# Altium PCB BOARD_34.PcbDoc
Units mm, origin at the board's own origin, x right, y up, seen from the top; angles counter-clockwise.
Board outline 34 x 34 mm, 2 copper layers (Top Layer 1, Bottom Layer 1), stack 1.6 mm thick; 56 components, 40 nets, 215 pads, 75 vias.
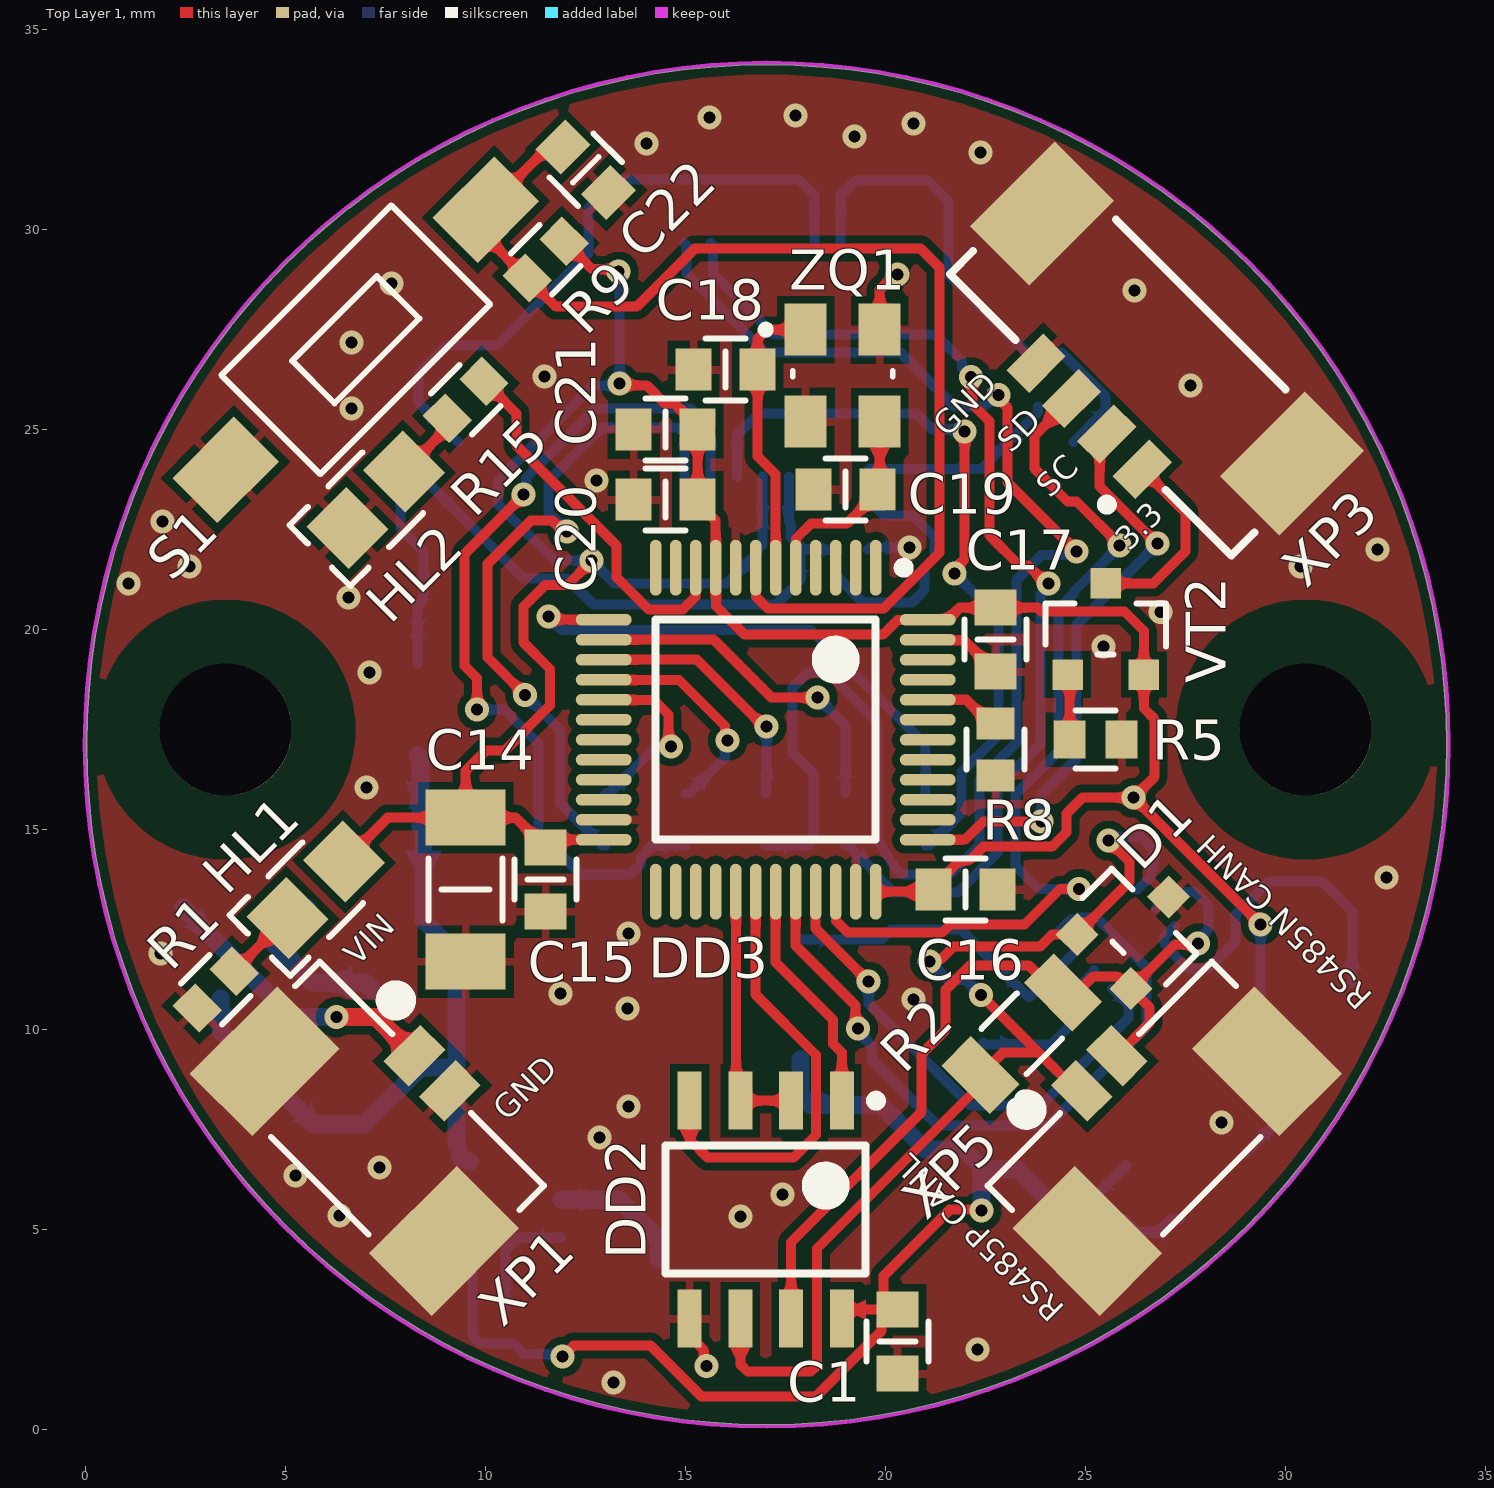
[diagram p0: Top Layer 1 view]
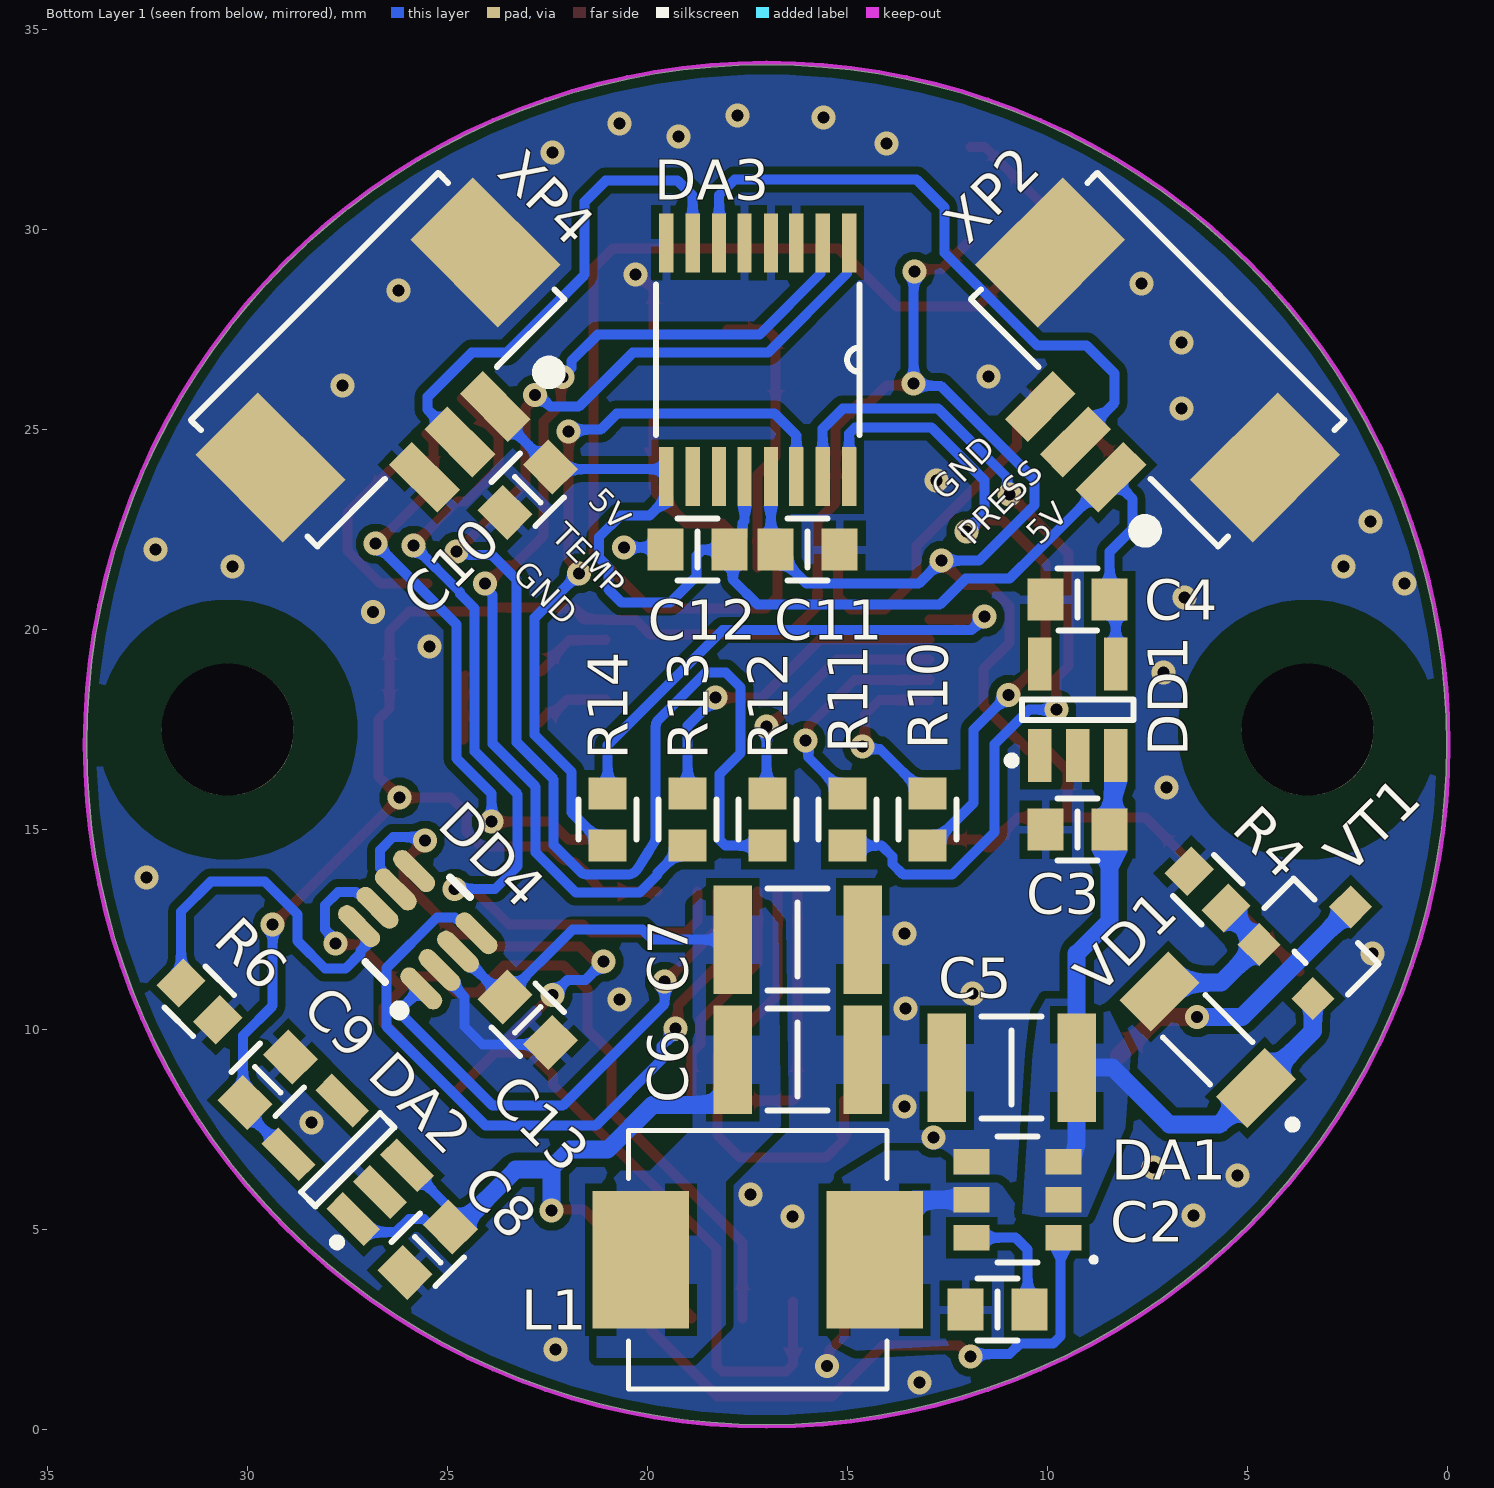
[diagram p1: Bottom Layer 1 view, seen from below]
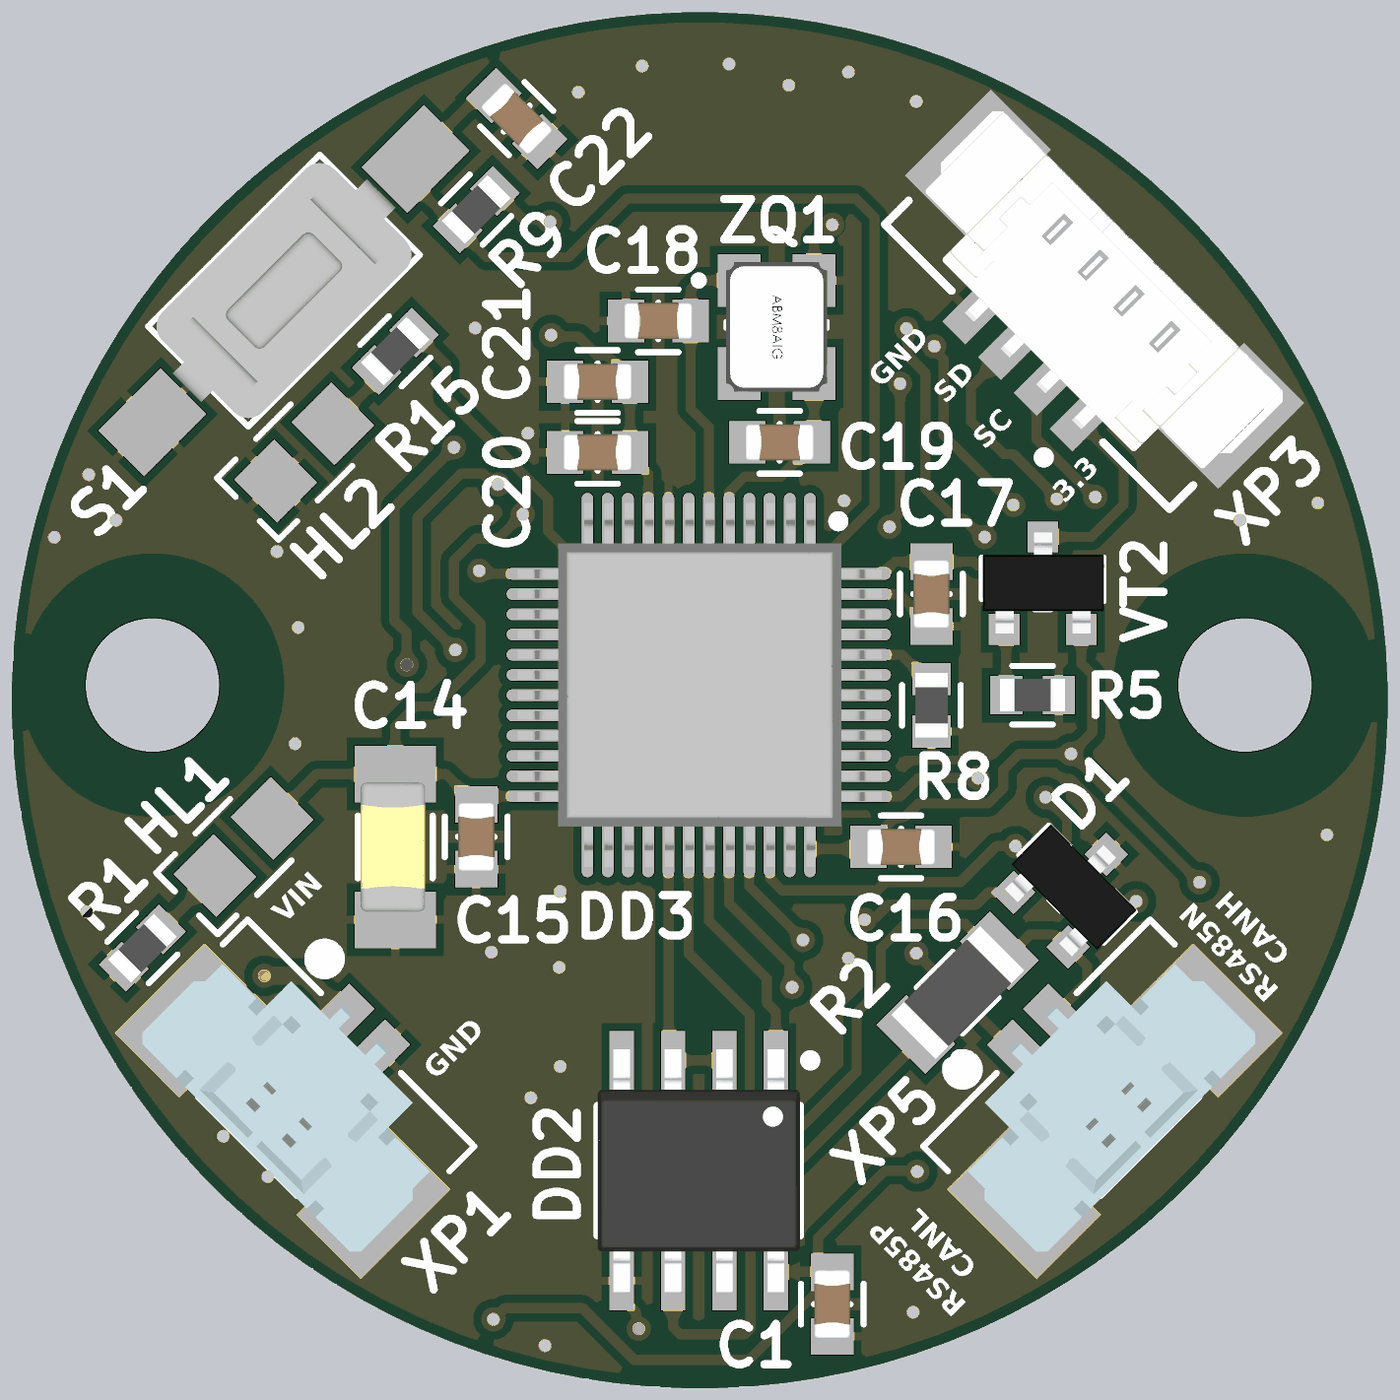
[diagram p2: 3D render of the assembled board from above, using the file's embedded part models]
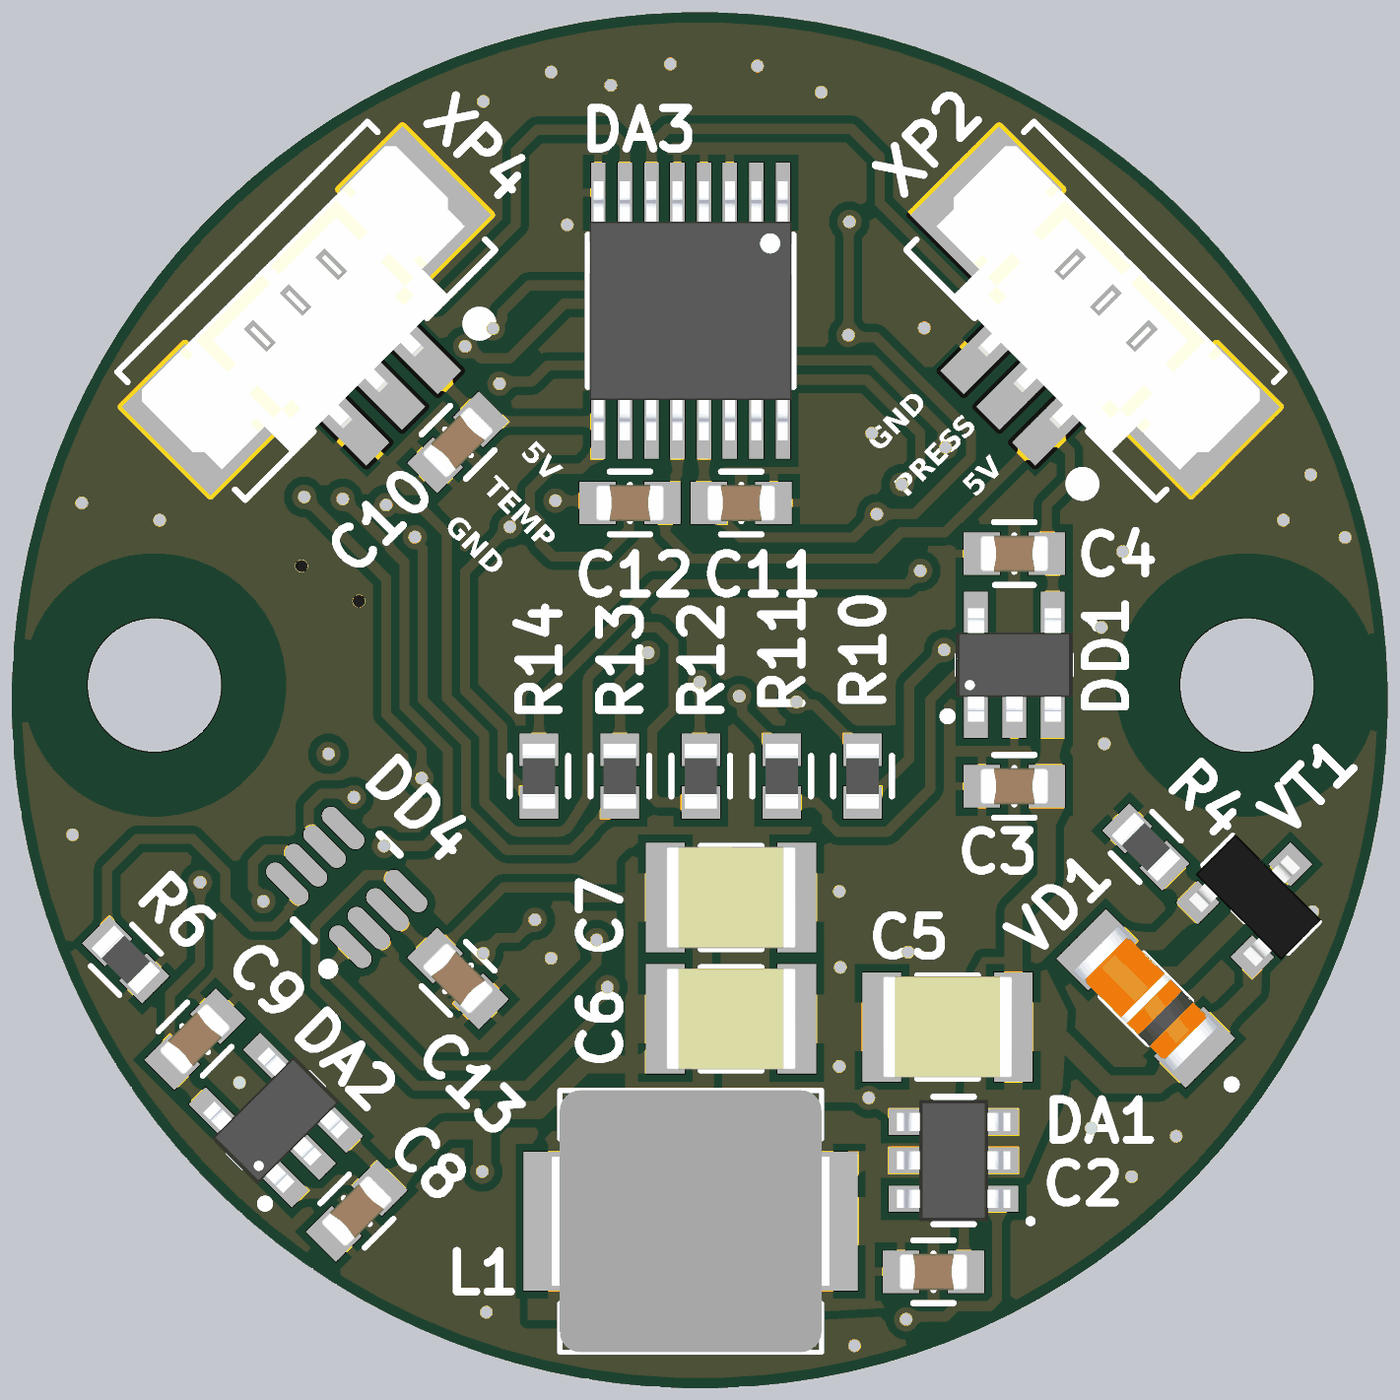
[diagram p3: 3D render of the assembled board from below, using the file's embedded part models]

## Layer stack, top to bottom
Top Solder: solder mask 0.0102, Solder Resist, Dk 3.5
Top Layer 1: signal copper 0.035
Dielectric 1: dielectric 1.53, FR-4, Dk 4.8
Bottom Layer 1: signal copper 0.035
Bottom Solder: solder mask 0.0102, Solder Resist, Dk 3.5

## Board outline
17.025,0.125 cw(c17.025,17.125) 0.025,17.125 cw(c17.025,17.125) 17.025,34.125 cw(c17.025,17.125) 34.025,17.125 cw(c17.025,17.125)

## Design rules (kind name [scope] priority, off if disabled: settings)
BoardOutlineClearance "BoardOutlineClearance 1" [All] p1: gap=0.25 ignorepadtopadclearanceinfootprint=FALSE except(0: Arc-SplitContinuation Track-SplitContinuation SMDPad-SplitContinuation THPad-SplitContinuation Via-SplitContinuation Fill-SplitContinuation Poly-SplitContinuation Region-SplitContinuation Text-SplitContinuation) // Milling
BoardOutlineClearance "BoardOutlineClearance 2" [All] p2: gap=0.4 ignorepadtopadclearanceinfootprint=FALSE except(0: Arc-SplitContinuation Track-SplitContinuation SMDPad-SplitContinuation THPad-SplitContinuation Via-SplitContinuation Fill-SplitContinuation Poly-SplitContinuation Region-SplitContinuation Text-SplitContinuation) // V-Cut
Clearance [All] p1: gap=0.2 ignorepadtopadclearanceinfootprint=FALSE
DiffPairsRouting [All] p1: maxlimit=0.254 minlimit=0.2 mostfreqgap=0.2 toplayer_minwidth=0.2 toplayer_maxwidth=0.35 toplayer_prefwidth=0.3 bottomlayer_minwidth=0.2 bottomlayer_maxwidth=0.35 bottomlayer_prefwidth=0.3 maxuncoupledlength=10
HoleSize [All] p1: absolutevalues=TRUE maxlimit=10 minlimit=0.3 maxpercent=80.000 minpercent=20.000
HoleToHoleClearance [All] p1: gap=0.2 allowstackedmicrovias=TRUE
MinimumAnnularRing MinimumAnnularRing_via [IsVia] p1: minimumring=0.15
MinimumAnnularRing [All] p2: minimumring=0.2
MinimumSolderMaskSliver [All] p1: minsoldermaskwidth=0.1
PlaneClearance [All] p1: clearance=0.2
PlaneConnect [All] p1: planeconnectstyle=Relief reliefexpansion=0.5 reliefentries=4 reliefconductorwidth=0.2 reliefairgap=0.3
PolygonConnect PolygonConnect_2 [InPadClass('direct')] p1: connectstyle=Direct reliefconductorwidth=0.254 reliefentries=4 polygonreliefangle="90 Angle" airgapwidth=0.254
PolygonConnect PolygonConnect_1 [InPadClass('power')] p2: connectstyle=Relief reliefconductorwidth=1.2 reliefentries=4 polygonreliefangle="90 Angle" conductorbypadedge=TRUE mindistance=0.1 enablemindistance=FALSE airgapwidth=0.2
PolygonConnect [All] p3: thpad.connectstyle=Relief thpad.reliefconductorwidth=0.2 thpad.reliefentries=4 thpad.polygonreliefangle="90 Angle" thpad.airgapwidth=0.2 smdpad.connectstyle=Relief smdpad.reliefconductorwidth=0.2 smdpad.reliefentries=4 smdpad.polygonreliefangle="90 Angle" smdpad.airgapwidth=0.2 via.connectstyle=Direct via.reliefconductorwidth=0.2 via.reliefentries=4 via.polygonreliefangle="90 Angle" via.airgapwidth=0.2
RoutingCorners [All] p1: cornerstyle=45-Degree minsetback=2 maxsetback=2
RoutingVias [All] p1: holewidth=0.3 width=0.6 viastyle="Through Hole" minholewidth=0.3 minwidth=0.6 maxholewidth=0.5 maxwidth=0.8
SilkToSilkClearance [All] p1: silktosilkclearance=0.15
SilkToSolderMaskClearance [IsPad] p1: minsilkscreentomaskgap=0.1 clearancetoexposedcopper=TRUE
SolderMaskExpansion SolderMaskExpansion_1 [IsVia] p1: expansion=0.102 istentingtop=TRUE
SolderMaskExpansion [All] p2: expansion=0.025 istentingtop=FALSE
SupplyNets "Schematic Supply Nets_9" [InNet('5V')] p1: voltage=0.000
SupplyNets "Schematic Supply Nets_8" [InNet('3.3V')] p2: voltage=0.000
SupplyNets "Schematic Supply Nets_7" [InNet('5RV')] p3: voltage=0.000
SupplyNets "Schematic Supply Nets_6" [InNet('GND')] p4: voltage=0.000
SupplyNets "Schematic Supply Nets_5" [InNet('24V')] p5: voltage=0.000
SupplyNets "Schematic Supply Nets_4" [InNet('+3,3В_IN')] p6: voltage=0.000
SupplyNets "Schematic Supply Nets_3" [InNet('+5В_IN')] p7: voltage=0.000
SupplyNets "Schematic Supply Nets_2" [InNet('+5В')] p8: voltage=0.000
SupplyNets "Schematic Supply Nets_1" [InNet('GND')] p9: voltage=0.000
SupplyNets "Schematic Supply Nets" [InNet('+3,3В')] p10: voltage=0.000
Width [All] p1: maxlimit=0.45 minlimit=0.15 preferedwidth=0.25
21 further rules are at their usual default settings.

## Classes and differential pairs
pad class direct: DA1-2 DA1-3 DA1-4 DA1-5 XP1-3 XP1-4 XP2-4 XP2-5 XP3-5 XP3-6 XP4-4 XP4-5 XP5-3 XP5-4
pad class power: C5-1 C5-2 C6-1 C6-2 C7-1 C7-2 L1-1 L1-2
differential pair RS485: +RS485_P -RS485_N

## Components (designator, comment, footprint, x,y, rotation, side; value= is the part's Value field where it differs from the comment)
C1 "Capacitor" 0603C 20.3,2.2 r90 top value="0,1 мк"
C2 "Capacitor" 0603C 11.25,3 r180 bottom value="0,1 мк"
C3 "Capacitor" 0603C 9.25,15 r0 bottom value="0,1 мк"
C4 "Capacitor" 0603C 9.25,20.75 r180 bottom value="0,1 мк"
C5 "Capacitor" 1210C 10.9,9.05 r180 bottom value="10 мк"
C6 "Capacitor" 1210C 16.25,9.25 r0 bottom value="22 мк"
C7 "Capacitor" 1210C 16.25,12.25 r0 bottom value="22 мк"
C8 "Capacitor" 0603C 25.5,4.5 r135 bottom value="1 мк"
C9 "Capacitor" 0603C 29.5,8.75 r315 bottom value="1 мк"
C10 "Capacitor" 0603C 23,23.5 r135 bottom value="0,1 мк"
C11 "Capacitor" 0603C 16,22 r0 bottom value="0,1 мк"
C12 "Capacitor" 0603C 18.75,22 r180 bottom value="0,1 мк"
C13 "Capacitor" 0603C 23,10.25 r45 bottom value="0,1 мк"
C14 "Capacitor" 1206C 9.5,13.5 r90 top value="4,7 мк"
C15 "Capacitor" 0603C 11.5,13.75 r90 top value="0,1 мк"
C16 "Capacitor" 0603C 22,13.5 r180 top value="0,1 мк"
C17 "Capacitor" 0603C 22.75,19.75 r90 top value="0,1 мк"
C18 "Capacitor" 0603C 16,26.5 r0 top value="12 п"
C19 "Capacitor" 0603C 19,23.5 r0 top value="12 п"
C20 "Capacitor" 0603C 14.5,23.25 r0 top value="0,1 мк"
C21 "Capacitor" 0603C 14.5,25 r0 top value="1 мк"
C22 "Capacitor" 0603C 12.5,31.5 r315 top value="0,1 мк"
D1 "PSM712" SOT23-3 26.25,12.5 r45 top
DA1 "AP63205" TSOT26 10.75,5.75 r90 bottom
DA2 "ADP150AUJZ-3.3" SOT23-5 27.5,6.75 r45 bottom
DA3 "ADS1220IPWR" TSSOP-16 17.25,26.75 r270 bottom
DD1 "ADR02BUJZ" SOT23-5 9.25,18 r90 bottom
DD2 "MAX485CSA" SOIC-8 17,5.5 r270 top
DD3 "STM32F103C8T6" LQFP48 17,17.5 r270 top
DD4 "MAX3051EKA+T" SOT-23-8 25.75,12.5 r45 bottom
HL1 "LED" 0805D 5.75,13.5 r225 top value=������
HL2 "LED" 0805D 7.25,23.25 r225 top value=Красный
L1 "IHLP2525CZER4R7M01" IHLP-2525 17.25,4.25 r0 bottom value="4,7 мк"
R1 "Resistor" 0603R 3.25,11 r225 top value="1,0 к"
R2 "Resistor" 1206R 23.4,9.9 r225 top value=120
R4 "Resistor" 0603R 6,13.5 r225 bottom value="100 к"
R5 "Resistor" 0603R 25.25,17.25 r0 top value="10 к"
R6 "Resistor" 0603R 31.21,10.71 r225 bottom value="10 к"
R8 "Resistor" 0603R 22.75,17 r270 top value="10 к"
R9 "Resistor" 0603R 11.5,29.25 r225 top value="10 к"
R10 "Resistor" 0603R 13,15.25 r90 bottom value=47
R11 "Resistor" 0603R 15,15.25 r90 bottom value=47
R12 "Resistor" 0603R 17,15.25 r90 bottom value=47
R13 "Resistor" 0603R 19,15.25 r90 bottom value=47
R14 "Resistor" 0603R 21,15.25 r90 bottom value=47
R15 "Resistor" 0603R 9.5,25.75 r45 top value=470
S1 "Tact_button" Button_SMD_10mm 6.75,27.25 r225 top
VD1 "BZV55-B12" mini_MELF_3.5mm 6,9.75 r45 bottom value="12 В"
VT1 "AO3401A" SOT23-3 3.25,12.25 r135 bottom
VT2 "AO3401A" SOT23-3 25.5,20 r90 top
XP1 "533984002" Picoblade_533984002 7.25,7.5 r135 top
XP2 "Picoblade_532610371" CONN_532610001-SD_03_MOL 7.25,26.75 r225 bottom
XP3 "53398-0471" 53398-0471 26.5,26.75 r315 top
XP4 "Picoblade_532610371" CONN_532610001-SD_03_MOL 26.75,26.75 r135 bottom
XP5 "533984002" Picoblade_533984002 26.75,7.5 r225 top
ZQ1 "XTAL_GND" QSMD3.2x2.5 18,27.5 r0 top value="8 МГц"

## Footprints (in the part's own frame and the unit in brackets; to place one, negate y for a bottom-side part, rotate by r counter-clockwise, add the part's x,y. Pads: shape width x height; smd on the part's side, far side on the other; paste and mask are expansions set on the pad)
0603C [mm] "Chip Resistor, 2-Leads, Body 1,40x0,80mm, IPC Medium Density"
  rect 0.9x1.05 smd: 1(-0.8,0) 2(0.8,0)
  silkscreen extent -0.5,-0.77 0.5,0.77, body extent -0.85,-0.45 0.85,0.45, height 0.9
0603R [mm] "Chip Resistor, 2-Leads, Body 1.60x0.85mm, IPC Medium Density"
  rect 0.8x0.95 smd: 1(-0.65,0) 2(0.65,0)
  silkscreen extent -0.5,-0.73 0.5,0.73, body extent -0.8,-0.4 0.8,0.4, height 0.45
0805D [mm]
  rect 1.4x1.5 smd: 1(-1,0) 2(1,0)
  silkscreen extent -0.6,-1.07 1.98,1.07, body extent -1.07,-0.7 1.07,0.7, height 0.7
1206C [mm]
  rect 1.4x2 smd paste+0: 1(-1.8,0) 2(1.8,0)
  silkscreen extent -0.77,-0.92 0.77,0.92, body extent -1.6,-0.74 1.6,0.86, height 1.59
1206R [mm]
  rect 1.05x1.72 smd: 1(-1.46,0) 2(1.46,0)
  silkscreen extent -0.63,-0.8 0.63,0.8, body extent -1.55,-0.78 1.55,0.77, height 0.65
1210C [mm]
  rect 0.954x2.706 smd paste+0: 1(-1.625,0) 2(1.625,0)
  silkscreen extent -0.75,-1.28 0.75,1.28, body extent -1.6,-1.25 1.6,1.25, height 2.7
53398-0471 [mm]
  rect 0.8x1.3 smd paste+0 mask+0: 1(1.875,-2) 2(0.625,-2) 3(-0.625,-2) 4(-1.875,-2)
  rect 2.1x3 smd paste+0 mask+0: 5(-4.425,0.75) 6(4.425,0.75)
  silkscreen extent -4.97,-3.37 4.97,1.95, body extent -5.58,-2.75 5.58,2.35, height 0.25
Button_SMD_10mm [mm]
  rect 2.18x1.6 smd: 1(-4.6,0) 2(4.6,0)
  silkscreen extent -3,-1.75 3,1.75, body extent -3.4,-1.75 3.4,1.75, height 5.2
CONN_532610001-SD_03_MOL [mil]
  rect 32x67 smd paste+0 mask+4.02: 1(49.21,-114.35) 2(0,-114.35) 3(-49.21,-114.35)
  rect 87x122 smd paste+0 mask+4.02: 4(-149.61,-0.18) 5(149.61,-0.18)
  silkscreen extent -172,-136 172,88, body extent -175,-106 175,59, height 185
IHLP-2525 [mil]
  rect 95x135 smd: 1(-115,0) 2(115,0)
  silkscreen extent -127,-127 127,127, body extent -135,-127 135,127, height 118
LQFP48 [mm] "TSQFP, 48-Leads, Body 7,00x7,00mm, Pitch 0,50mm, IPC Medium Density"
  oval 1.4x0.29 smd: 1(-4.05,2.75) 2(-4.05,2.25) 3(-4.05,1.75) 4(-4.05,1.25) 5(-4.05,0.75) 6(-4.05,0.25) 7(-4.05,-0.25) 8(-4.05,-0.75) 9(-4.05,-1.25) 10(-4.05,-1.75) 11(-4.05,-2.25) 12(-4.05,-2.75) 25(4.05,-2.75) 26(4.05,-2.25) 27(4.05,-1.75) 28(4.05,-1.25) 29(4.05,-0.75) 30(4.05,-0.25) 31(4.05,0.25) 32(4.05,0.75) 33(4.05,1.25) 34(4.05,1.75) 35(4.05,2.25) 36(4.05,2.75)
  oval 0.29x1.4 smd: 13(-2.75,-4.05) 14(-2.25,-4.05) 15(-1.75,-4.05) 16(-1.25,-4.05) 17(-0.75,-4.05) 18(-0.25,-4.05) 19(0.25,-4.05) 20(0.75,-4.05) 21(1.25,-4.05) 22(1.75,-4.05) 23(2.25,-4.05) 24(2.75,-4.05) 37(2.75,4.05) 38(2.25,4.05) 39(1.75,4.05) 40(1.25,4.05) 41(0.75,4.05) 42(0.25,4.05) 43(-0.25,4.05) 44(-0.75,4.05) 45(-1.25,4.05) 46(-1.75,4.05) 47(-2.25,4.05) 48(-2.75,4.05)
  silkscreen extent -4.17,-2.75 2.75,3.58, body extent -4.5,-4.47 4.5,4.52, height 1.48
mini_MELF_3.5mm [mm]
  rect 1.11x1.73 smd: 1(1.705,0) 2(-1.705,0)
  silkscreen extent -3.1,-0.75 0.83,0.75, body extent -1.75,-0.8 1.75,0.8, height 1.59
Picoblade_533984002 [mil]
  rect 35x51 smd: 1(24.61,-78.57) 2(-24.61,-78.57)
  rect 87x122 smd: 3(-125,29.69) 4(125,29.69)
  silkscreen extent -156,-114 156,78, body extent -151,-85 151,80, height 185
QSMD3.2x2.5 [mm] "Кварцевый резонатор"
  rect 1.05x1.3 smd: 1(0,0) 2(1.85,-2.3) 3(0,-2.3) 3(1.85,0)
  silkscreen extent -1.1,-1.18 2.18,0.1, body extent -0.32,-2.75 2.18,0.45, height 0.8
SOIC-8 [mm] "for operational amplifier"
  rect 1.45x0.6 smd: 1(-2.725,1.905) 2(-2.725,0.635) 3(-2.725,-0.635) 4(-2.725,-1.905) 5(2.725,-1.905) 6(2.725,-0.635) 7(2.725,0.635) 8(2.725,1.905)
  silkscreen extent -2.85,-2.5 1.6,2.88, body extent -3,-2.5 3,2.5, height 1.75
SOT23-3 [mil]
  rect 30x30 smd: 1(-44.29,37.4) 2(-44.29,-37.6) 3(45.71,-0.1)
  silkscreen extent -25,-59 26,59, body extent -48,-60 50,59, height 41
SOT23-5 [mm]
  rect 1.32x0.59 smd: 1(-1.145,0.95) 2(-1.145,0) 3(-1.145,-0.95) 4(1.145,-0.95) 5(1.145,0.95)
  silkscreen extent -1.37,-1.4 0.25,1.75, body extent -1.4,-1.45 1.4,1.45, height 1.45
SOT-23-8 [mm] "SOP, 8-Leads, Body 2.9x1.6mm, Pitch 0.65mm, IPC High Density"
  oval 1.3x0.45 smd: 1(-1.1,0.975) 2(-1.1,0.325) 3(-1.1,-0.325) 4(-1.1,-0.975) 5(1.1,-0.975) 6(1.1,-0.325) 7(1.1,0.325) 8(1.1,0.975)
  silkscreen extent -1.22,-1.5 0.35,1.87, body extent -0.85,-1.5 0.85,1.5, height 1.45
TSOT26 [mm]
  rect 0.645x0.9 smd: 1(-0.95,-1.15) 2(0,-1.15) 3(0.95,-1.15) 4(0.95,1.15) 5(0,1.15) 6(-0.95,1.15)
  silkscreen extent -1.58,-1.95 1.57,0.5, body extent -1.5,-1.4 1.5,1.4, height 1.01
TSSOP-16 [mil]
  rect 58x14 smd: 1(-115,90) 2(-115,64) 3(-115,38) 4(-115,13) 5(-115,-13) 6(-115,-38) 7(-115,-64) 8(-115,-90) 9(115,-90) 10(115,-64) 11(115,-38) 12(115,-13) 13(115,13) 14(115,38) 15(115,64) 16(115,90)
  silkscreen extent -74,-100 74,100, body extent -126,-98 126,98, height 43

## Part data
C1 C2 C3 C4 C10 C11 C12 C13 C15 C16 C17 C20 C22: library part Capacitor_0,1u_10_50V_X7R_0603C, "Конденсатор 0603C ёмкостью 0,1 мк 10%, 50 В, X7R", Capacity (nF)=100, Dielectric=X7R, Tolerance=10%, Voltage (V)=50, Part Number=Capacitor_0,1u_10_50V_X7R_0603C
C5: library part Capacitor_10u_10_35V_X7R_1210C, "Конденсатор 1210C ёмкостью 10 мк 10%, 35 В, X7R", Capacity (nF)=10000, Dielectric=X7R, Tolerance=10%, Voltage (V)=35, Part Number=Capacitor_10u_10_35V_X7R_1210C
C6 C7: library part Capacitor_22u_10_25V_X7R_1210C, "Конденсатор 1210C ёмкостью 22 мк 10%, 25 В, X7R", Capacity (nF)=22000, Dielectric=X7R, Tolerance=10%, Voltage (V)=25, Part Number=Capacitor_22u_10_25V_X7R_1210C
C8 C9 C21: library part Capacitor_1u_10_25V_X7R_0603C, "Конденсатор 0603C ёмкостью 1 мк 10%, 25 В, X7R", Capacity (nF)=1000, Dielectric=X7R, Tolerance=10%, Voltage (V)=25, Part Number=Capacitor_1u_10_25V_X7R_0603C
C14: library part Capacitor_4,7u_10_50V_X7R_1206C, "Конденсатор 1206C ёмкостью 4,7 мк 10%, 50 В, X7R", Capacity (nF)=4700, Dielectric=X7R, Tolerance=10%, Voltage (V)=50, Part Number=Capacitor_4,7u_10_50V_X7R_1206C
C18 C19: library part Capacitor_12p_5_50V_NP0_0603C, "Конденсатор 0603C ёмкостью 12 п 5%, 50 В, NP0", Capacity (nF)=0,012, Dielectric=NP0, Tolerance=5%, Voltage (V)=50, Part Number=Capacitor_12p_5_50V_NP0_0603C, Автор=glebmih
D1: "Защитный диод для линии RS-485", Interface=RS-485, Part Number=PSM712
DA1: "DC-DC понижающий преобразователь, Vin: 3.8 - 40 В; 5 В; 2 А", Datasheet=https://static.chipdip.ru/lib/416/DOC012416105.pdf, Part Number=AP63205, Автор=glebmih
DA2: "Стабилизатор напряжения 3.3В 150мА", Datasheet=https://static.chipdip.ru/lib/986/DOC003986581.pdf, Part Number=ADP150AUJZ-3.3, Автор=glebmih
DA3: "24-Бит Sigma-Delta аналого-цифровой преобразователь", Datasheet="Low-Power, Low-Noise, 24-Bit, ADC for Small-Signal Sensors (Rev. B)", Part Number=ADS1220IPWR, Автор=Vouka06
DD1: "Источник опорного напряжения, 5В", Datasheet="ADR01/ADR02/ADR03/ADR06 (Rev. S)", Part Number=ADR02BUJZ, Автор=Vouka05
DD2: "RS-485 ���������������", Part Number=MAX485CSA
DD3: "Микроконтроллер", Case=корпус, Manufacturer="ST Microelectronics", Value1=MCU, Datasheet=http://www.st.com/content/ccc/resource/technical/document/datasheet/33/d4/6f/1d/df/0b/4c/6d/CD00161566.pdf/files/CD00161566.pdf/jcr:content/translations/en.CD00161566.pdf, Notice="48 пиновая версия STM32F103", Part Number=STM32F103C8T6, Rate=-0,3...4,0В, Shop="магазин с самой дешевой ценой"
DD4: "CAN трансивер 1Mbps +3.3В", Datasheet="MAX3051 - +3.3V, 1Mbps, Low-Supply-Current CAN Transceiver", Part Number=MAX3051EKA+T, Автор=Vouka06
HL1 HL2: "Светодиод", Part Number=LED
L1: "ЧИП-индуктивность экранированная 4,7мкГн ±20% 5,5A 40мОм 2525", Current="5,5 А", Inductance (μH)=4,7, Part Number=IHLP2525CZER4R7M01
R1: library part Resistor_1.0k_1_0603, "Резистор номиналом 1,0 кОм 1%", Tolerance=1%, Part Number=Resistor_1.0k_1_0603
R2: library part Resistor_120_1_1206, "Резистор номиналом 120 Ом 1%", Tolerance=1%, Part Number=Resistor_120_1_1206, Автор=glebmih
R4: library part Resistor_100k_1_0603, "Резистор номиналом 100 кОм 1%", Tolerance=1%, Part Number=Resistor_100k_1_0603
R5 R6 R8 R9: library part Resistor_10k_1_0603, "Резистор номиналом 10 кОм 1%", Tolerance=1%, Part Number=Resistor_10k_1_0603
R10 R11 R12 R13 R14: library part Resistor_47_1_0603, "Резистор номиналом 47 Ом 1%", Tolerance=1%, Part Number=Resistor_47_1_0603
R15: library part Resistor_470_1_0603, "Резистор номиналом 470 Ом 1%", Tolerance=1%, Part Number=Resistor_470_1_0603
S1: "Тактовая кнопка", Part Number=Tact_button
VD1: "Стабилитрон 12В, 5%, 0.5Вт", Current="5 мА", Power (W)=0.5, Voltage (V)=12, Accuracy=0,02, Part Number=BZV55-B12, Автор=rreali
VT1 VT2: "P-канальный MOSFET", Part Number=AO3401A
XP1: library part Picoblade_533984002, "2pin, 1.25mm, вилка, PicoBlade, на плату, SMT", Value1=24V, Value2=GND, Value3=Корпус, Datasheet=https://www.molex.com/en-us/products/part-detail/533984002?display=pdf, Part Number=Picoblade_533984002, System=Connector, Value4=Корпус, Автор=rreali
XP2 XP4: "Picoblade 3-pin разъем", Value1=5RV, Value2=Signal, Value3=GND, Value4=Корпус, Part Number=Picoblade_532610371, System=Connector, Value5=Корпус, Автор=Vouka06
XP3: library part PicoBlade_53398-0471, "Разъем PicoBlade 1.25 мм, 4pin", Value1=3.3V, Value2=SWCLK, Value3=SWDIO, Value4=GND, Value5=Корпус, Datasheet="53398-0471, Разъем PicoBlade 1.25 мм, 4pin, штыревой , на плату – купить оптом и в розницу", Part Number=PicoBlade_53398-0471, System=Connector, Value6=Корпус, Автор=Vouka06
XP5: library part Picoblade_533984002, "2pin, 1.25mm, вилка, PicoBlade, на плату, SMT", Value1=RS485_P(CANL), Value2=RS485_N(CANH), Value3=Корпус, Datasheet=https://www.molex.com/en-us/products/part-detail/533984002?display=pdf, Part Number=Picoblade_533984002, System=Connector, Value4=Корпус, Автор=rreali
ZQ1: "Кварцевый резонатор с входом земли", Part Number=XTAL_GND

## Free pads (board coordinates)
  round 3.3 hole 3.3 unplated: 1(3.5,17.5) 1(30.5,17.5)

## Via types
v1: diameter 0.6, hole 0.3, Top Layer 1 to Bottom Layer 1, tented both sides, 75 vias

## Nets (pads, with @x,y where several pads share a name; then routed paths per layer and width w, separated by ;. In a path a pad name is that pad's centre, name@x,y a point inside that pad or via, vN(x,y) a via of type N, cw(c..) or ccw(c..) an arc to the next point about the centre after c; other vN are vias at no path point)
3.3V: C9.2 C11.2 C14.2 C15.2 C16.2 C17.2 C20.2 C21.2 DA2.5 DA3.13 DD3.9 DD3.24 DD3.36 DD3.48 HL1.1 R9.1 VT2.2 | length 76.8
  Top Layer 1 w0.25: HL1.1 7.55,15.3 C14.2 ; R9.1 12.652,29.017 13.258,29.017 v1(13.325,28.95) ; v1(12.65,21.725) 12.046,21.121 11.487,21.121 10.95,20.584 10.95,19.677 11.61,19.017 11.61,18.11 10.475,16.975 10,16.975 9.5,16.475 C14.2 ; DD3.24 11.7,14.75 C15.2 11.425,14.55 11.1,14.875 11.1,14.95 10.75,15.3 C14.2 ; v1(13.35,26.15) 13.39,26.11 14.025,26.11 14.485,25.65 14.725,25.65 15.3,25.075 C20.2 15.3,23.175 15.75,22.725 DD3.9 15.758,21.542 15.758,20.592 16.475,19.875 19.931,19.875 20.298,20.242 21.042,20.242 DD3.48 21.594,20.25 21.613,20.268 21.613,20.313 21.85,20.55 23.791,20.55 23.886,20.455 25.97,20.455 26.455,19.97 VT2.2 26.455,18.03 26.725,17.76 26.725,16.325 v1(26.2,15.8) ; DD3.36 21.15,13.45 21.525,13.9 21.752,14.127 cw(c21.929,13.95) 21.872,14.193 22.046,14.234 ccw(c21.99,14.478) 22.166,14.301 22.44,14.575 24.159,14.575 24.525,14.941 24.525,15.41 24.915,15.8 v1(26.2,15.8) ; v1(29.375,12.625) v1(26.2,15.8)
  Bottom Layer 1 w0.25: v1(13.325,28.95) 13.35,28.925 v1(13.35,26.15) 13.298,26.098 12.675,26.098 10.325,23.748 10.325,23.116 11.716,21.725 v1(12.65,21.725) 13.225,21.15 16.025,21.15 16.8,21.925 C11.2 16.92,22.12 DA3.13 ; DA2.5 30.066,7.972 C9.2 30.119,8.237 30.119,9.856 29.375,10.6 v1(29.375,12.625)
5RV: C4.2 C10.2 C12.2 DA3.9 DA3.12 DD1.4 XP2.1 XP4.1 | length 32.2
  Bottom Layer 1 w0.25: DD1.4 8.3,20.6 C4.2 8.45,21.95 7.875,22.525 7.875,23.267 XP2.1 10.632,21.6 10.635,21.6 10.96,21.275 12.05,21.275 12.7,20.625 17.25,20.625 17.871,21.246 17.871,21.921 C12.2 ; DA3.12 17.58,22.717 17.625,22.673 17.625,22.325 C12.2 ; XP4.1 23.812,25.444 C10.2 22.381,24.013 19.589,24.013 19.536,23.96 DA3.9 19.589,23.776 19.589,23.217 19.956,22.85 20.684,22.85 21.218,22.316 21.218,21.798 20.975,21.555 20.975,21 20.65,20.675 19.44,20.675 18.775,21.34 18.775,21.854 18.629,22 C12.2
5V: C1.2 C6.2 C7.2 C8.2 C13.2 DA1.1 DA2.1 DA2.3 DD2.8 DD4.3 L1.2 | length 43.4
  Top Layer 1 w0.25: v1(11.925,1.825) 12.2,2.1 14.125,2.1 15.4,0.825 18.25,0.825 19.9,2.475 19.9,2.675 20.225,3 C1.2 ; DD2.8 18.905,2.825 19.08,3 19.95,3 19.95,3.85 21.6,5.5 22.376,5.5 v1(22.4,5.476)
  Bottom Layer 1 w0.25: DA1.1 9.675,4.725 9.675,2.34 9.865,2.15 10.7,2.15 10.958,1.892 11.858,1.892 v1(11.925,1.825) ; C7.2 19.88,12.25 20.13,12.5 21.881,12.5 C13.2 23.606,10.816 DD4.3 ; DA2.3 25.09,5.683 25.09,5.681 24.934,5.525 C8.2 25.394,5.066 25.597,5.269 25.969,5.269 26.298,4.94 26.793,4.94 27.122,5.269 DA2.1
  Bottom Layer 1 w0.45: C6.2 17.875,8.374 18.127,8.122 19.878,8.122 21,7 21.95,7 22.45,6.5 ; v1@22.401,5.476 22.401,6.451 22.45,6.5 ; C8.2 24.734,5.066 23.3,6.5 22.45,6.5
24V: C3.1 C5.2 DA1.2 DA1.3 DD1.3 VD1.2 VT1.2 | length 19
  Bottom Layer 1 w0.45: VT1.2 3.37,9.969 VD1.2 5.714,7.625 6.95,7.625 8.375,9.05 C5.2 ; DD1.3 8.37,16.785 8.37,15.08 C3.1 8.45,12.726 9.275,11.901 C5.2 ; DA1.3 9.375,6.798 9.293,7.083 cw(c9.725,7.208) 9.275,7.208 C5.2
BOOT0: DD3.44 R8.1 | length 1.9
  Top Layer 1 w0.25: DD3.44 22.015,18.25 22.34,17.925 22.475,17.925 R8.1
CAN_RX: DD3.32 DD4.4 | length 18
  Top Layer 1 w0.25: DD3.32 17.75,12.1 19.24,10.61 19.24,10.101 v1(19.307,10.034)
  Bottom Layer 1 w0.25: v1(19.307,10.034) 19.307,9.939 19.652,9.594 19.652,9.248 21.3,7.6 24.05,7.6 26.525,10.075 26.525,11.548 25.271,12.803 24.815,12.803 24.763,12.75 24.622,12.75 DD4.4
CAN_TX: DD3.33 DD4.1 | length 12.7
  Top Layer 1 w0.25: DD3.33 18.25,12.525 v1(19.575,11.2)
  Bottom Layer 1 w0.25: v1(19.575,11.2) 19.575,10.65 22.125,8.1 23.875,8.1 26.075,10.3 26.075,10.619 DD4.1
DATA_READY: DA3.14 R14.1 | length 18.8
  Top Layer 1 w0.25: v1(21.714,21.411) 21.714,21.505 21.975,21.766 v1(21.975,24.95)
  Bottom Layer 1 w0.25: DA3.14 16.285,24.86 16.825,25.4 20.775,25.4 21.175,25 21.925,25 v1(21.975,24.95) ; R14.1 21.075,14.6 21.9,15.425 21.9,16.446 22.825,17.371 22.825,20.3 v1(21.714,21.411)
GND: C1.1 C3.2 C4.1 C5.1 C6.1 C7.1 C8.1 C9.1 C10.1 C11.1 C12.1 C13.1 C14.1 C15.1 C16.1 C17.1 C18.1 C19.1 C20.1 C21.1 C22.2 D1.3 DA1.4 DA2.2 DA3.3 DA3.4 DA3.5 DA3.8 DD1.2 DD2.5 DD3.8 DD3.23 DD3.35 DD3.47 DD4.2 HL2.2 R1.2 R4.1 R5.2 R6.2 R8.2 S1.2 XP1.2 XP1.3 XP1.4 XP2.3 XP2.4 XP2.5 XP3.4 XP3.5 XP3.6 XP4.3 XP4.4 XP4.5 XP5.3 XP5.4 ZQ1.3 | length 10.1
  Top Layer 1 w0.25: DD2.5 15.095,2.35 15.45,1.995 15.45,1.659 v1(15.517,1.592) ; ZQ1.3@19.85,27.5 19.85,28.5 20.225,28.875 v1(20.3,28.875) ; DD3.47 21.058,19.742 21.958,19.742 22.35,19.35 22.35,19.275 22.675,18.95 C17.1
  Bottom Layer 1 w0.25: C12.1 19.607,22.057 v1(20.593,22.057) ; C13.1 22.487,9.631 24.131,9.631 24.58,10.08 24.58,10.816 25.202,11.438 DD4.2
  other v1: 13.2,1.175 22.3,2 16.375,5.325 6.35,5.35 17.425,5.875 5.25,6.35 7.35,6.55 12.85,7.3 28.4,7.675 13.575,8.075 13.55,10.525 20.7,10.75 11.875,10.9 1.875,11.9 13.575,12.4 32.525,13.8 7.025,16.05 7.1,18.925 25.45,19.575 26.867,20.442 6.575,20.8 1.075,21.15 2.6,21.575 30.375,21.575 32.3,22 1.925,22.7 12.775,23.725 6.65,25.525 27.625,26.1 11.475,26.325 6.65,27.175 26.225,28.475 7.65,28.65 22.375,31.925 14.025,32.15 19.225,32.325 20.7,32.65 15.6,32.8 17.75,32.85
NetC2_1: C2.1 DA1.5 L1.1 | length 3.3
  Bottom Layer 1 w0.45: DA1.5 13.337,5.75 14.329,4.758 L1.1
NetC2_2: C2.2 DA1.6 | length 3
  Bottom Layer 1 w0.25: C2.2 10.5,3.05 10.5,4.5 10.8,4.8 DA1.6
NetDD3_10: DD3.10 R15.2 | length 9.4
  Top Layer 1 w0.25: R15.2 10.763,25.406 10.763,24.611 13.275,22.1 13.275,21.305 14.08,20.5 14.92,20.5 15.242,20.823 15.242,21.542 DD3.10
NetDD3_13: DD3.13 R14.2 | length 13.4
  Top Layer 1 w0.25: v1(11.575,20.325) 11.67,20.325 11.745,20.25 DD3.13
  Bottom Layer 1 w0.25: v1(11.575,20.325) 11.906,19.994 18.127,19.994 21,17.12 R14.2
NetDD3_14: DD3.14 R13.2 | length 8.6
  Top Layer 1 w0.25: DD3.14 15.7,19.75 17.15,18.3 v1(18.3,18.3)
  Bottom Layer 1 w0.25: v1(18.3,18.3) 19,17.6 R13.2
NetDD3_15: DD3.15 R12.2 | length 6.5
  Top Layer 1 w0.25: DD3.15 15.281,19.25 16.956,17.575 v1(17.025,17.575)
  Bottom Layer 1 w0.25: R12.2 17.025,15.925 v1(17.025,17.575)
NetDD3_16: DD3.16 R11.2 | length 5.7
  Top Layer 1 w0.25: DD3.16 12.958,18.742 14.833,18.742 15.983,17.592 15.983,17.292 v1(16.05,17.225)
  Bottom Layer 1 w0.25: R11.2 15.075,15.9 15.983,16.808 15.983,17.158 v1(16.05,17.225)
NetDD3_17: DD3.17 R10.2 | length 4.7
  Top Layer 1 w0.25: DD3.17 12.958,18.242 14.208,18.242 14.567,17.883 14.567,17.151 v1(14.634,17.084)
  Bottom Layer 1 w0.25: R10.2 13.075,15.9 14.192,17.017 14.567,17.017 v1(14.634,17.084)
NetDD4_8: DD4.8 R6.1 | length 8.9
  Bottom Layer 1 w0.25: DD4.8 26.955,12.326 26.955,12.195 27.185,11.965 27.185,11.897 27.551,11.531 28.069,11.531 28.75,12.212 28.75,12.884 29.566,13.7 30.925,13.7 31.669,12.956 R6.1
NetHL1_2: HL1.2 R1.1 | length 1.9
  Top Layer 1 w0.25: R1.1 HL1.2
NetHL2_1: HL2.1 R15.1 | length 1.8
  Top Layer 1 w0.25: HL2.1 9.04,25.04 R15.1
NetR4_2: R4.2 VD1.1 VT1.1 | length 4.2
  Bottom Layer 1 w0.45: R4.2 5.54,12.995 4.717,12.172 VT1.1 5.669,11.175 6.987,11.175 VD1.1
NetR5_1: R5.1 VT2.1 | length 1.6
  Top Layer 1 w0.2: VT2.1 VT2.1@24.6,18.825
  Top Layer 1 w0.25: R5.1 VT2.1@24.6,18.825
NetVT1_3: VT1.3 XP1.1 | length 7.4
  Top Layer 1 w0.45: v1(6.266,10.316) 7.257,10.316 XP1.1
  Bottom Layer 1 w0.45: VT1.3 2.52,12.977 2.52,12.941 5.145,10.316 v1(6.266,10.316)
NetVT2_3: VT2.3 XP3.1 | length 4.8
  Top Layer 1 w0.25: VT2.3 26.695,21.161 27.5,21.966 27.5,22.922 XP3.1
OSCin: C19.2 DD3.5 ZQ1.2 | length 5
  Top Layer 1 w0.25: DD3.5 17.758,21.558 17.758,22.277 18.13,22.65 19.025,22.65 19.8,23.425 C19.2 19.85,23.55 ZQ1.2
OSCout: C18.2 DD3.6 ZQ1.1 | length 7.2
  Top Layer 1 w0.25: DD3.6 17.25,23.877 16.8,24.327 C18.2 16.8,27.275 17.025,27.5 ZQ1.1
Pressure_sensor: DA3.6 XP2.2 | length 16
  Bottom Layer 1 w0.25: XP2.2 8.325,25.675 8.325,26.4 9.025,27.1 10.257,27.1 12.575,29.418 12.575,30.55 13.275,31.25 17.83,31.25 18.215,30.865 DA3.6
RESET: C22.1 DD3.7 R9.2 S1.1 | length 29.3
  Top Layer 1 w0.25: C22.1 11.566,32.066 S1.1 10.003,29.828 R9.2 11.756,28.075 13.775,28.075 15.225,29.525 20.875,29.525 21.35,29.05 21.35,21.93 20.112,20.692 19.945,20.525 17.055,20.525 16.758,20.823 16.758,21.542 DD3.7
RS485_N: D1.2 DD2.7 DD4.7 R2.1 XP5.2 | length 22.3
  Top Layer 1 w0.25: DD2.7 17.635,4.685 20.9,7.95 20.9,9.4 21.5,10 21.5,11 22.1,11.6 23.588,11.6 24.256,10.932 R2.1 24.786,10.932 25.189,11.335 25.72,11.335 cw(c25.72,11.085) 25.896,11.263 25.949,11.21 D1.2 ; XP5.2 26.6,10.172 26.6,10.559 D1.2 ; v1(27.81,12.156) 27.785,12.131 27.232,12.131 D1.2
  Bottom Layer 1 w0.25: DD4.7 27.096,13.387 27.238,13.387 27.29,13.439 27.746,13.439 28.068,13.117 28.068,12.508 27.81,12.251 v1(27.81,12.156)
RS485_P: D1.1 DD2.6 DD4.6 R2.2 XP5.1 | length 28.9
  Top Layer 1 w0.25: DD2.6@16.365,3.2 DD2.6 16.365,1.635 16.545,1.455 18.134,1.455 18.28,1.601 18.28,4.53 22.368,8.618 R2.2 22.925,9.425 23.825,9.425 ; v1(21.1,11.7) 21.167,11.767 21.387,11.767 21.695,12.075 23.858,12.075 24.159,12.376 D1.1 ; v1(22.376,10.874) 23.825,9.425 ; D1.1@24.783,12.392 26.1,13.709 26.1,14.2 v1(25.573,14.727) ; XP5.1 24.781,8.469 23.825,9.425
  Bottom Layer 1 w0.25: v1(21.1,11.7) 21.551,11.249 22.001,11.249 v1(22.376,10.874) ; v1(25.573,14.727) 25.668,14.727 25.758,14.818 26.367,14.818 26.689,14.496 26.689,14.04 26.637,13.988 26.637,13.846 DD4.6
SPI1_SCK: DA3.1 R12.1 | length 37.9
  Top Layer 1 w0.25: v1(22.822,25.871) 22.822,25.776 23.05,25.548 23.05,23.675 v1(24.775,21.95)
  Bottom Layer 1 w0.25: DA3.1 15.017,29.618 15.017,28.905 16.996,26.925 20.375,26.925 21.725,25.575 22.431,25.575 22.727,25.871 v1(22.822,25.871) ; R12.1 18.054,14.6 18.2,14.746 18.2,16.39 17.675,16.915 17.675,18.559 18.041,18.925 18.559,18.925 19.727,17.757 cw(c19.55,17.58) 19.8,17.58 19.8,14.822 ccw(c20.05,14.822) 19.837,14.692 19.96,14.49 ccw(c21.057,15.159) 19.968,14.477 20.25,14.027 ccw(c20.525,14.2) 20.525,13.875 21.506,13.875 ccw(c21.506,14.125) 21.683,13.948 22.35,14.615 22.35,16.259 23.275,17.184 23.275,21.25 23.887,21.862 24.454,21.862 24.474,21.883 24.708,21.883 v1(24.775,21.95)
SPI_MISO: DA3.15 R11.1 | length 21.9
  Top Layer 1 w0.25: v1(9.783,18) 9.783,18.787 9.475,19.096 9.475,21.9 v1(10.95,23.375)
  Bottom Layer 1 w0.25: v1(9.783,18) 10.47,18 11.325,17.145 11.325,14.94 12.39,13.875 13.61,13.875 13.88,14.145 13.88,14.33 14.15,14.6 R11.1 ; v1(10.95,23.375) 11.017,23.442 11.017,23.803 12.739,25.525 15.125,25.525 15.624,25.026 DA3.15
SPI_MOSI: DA3.16 R10.1 | length 17.4
  Top Layer 1 w0.25: v1(10.985,18.368) 10.05,19.304 10.05,21.65 11.125,22.725 11.671,22.725 11.938,22.458 v1(12.033,22.458)
  Bottom Layer 1 w0.25: v1(10.985,18.368) 11.851,17.503 11.851,15.674 12.925,14.6 R10.1 ; v1(12.033,22.458) 11.575,22.916 11.575,23.725 12.9,25.05 14.818,25.05 14.964,24.904 DA3.16
SPI_NSS: DA3.2 R13.1 | length 26.5
  Top Layer 1 w0.25: v1(22.134,26.314) 22.17,26.278 22.17,25.639 22.6,25.209 22.6,22.35 23.347,21.603 23.557,21.603 24.003,21.158 v1(24.067,21.158)
  Bottom Layer 1 w0.25: DA3.2 15.677,29.618 15.677,28.905 17.207,27.375 21.25,27.375 21.91,26.715 21.91,26.539 v1(22.134,26.314) ; R13.1 19.075,14.6 19.75,13.925 19.75,13.879 20.204,13.425 21.796,13.425 22.8,14.429 22.8,16.073 23.875,17.148 23.875,20.871 24.067,21.063 v1(24.067,21.158)
SWCLK: DD3.37 XP3.2 | length 14.6
  Top Layer 1 w0.25: DD3.37 21.979,14.75 22.429,15.2 v1(23.9,15.2) ; XP3.2 25.351,24.717 25.351,23.975 25.344,23.968 25.344,23.587 26.781,22.15 v1(26.8,22.15)
  Bottom Layer 1 w0.25: v1(23.9,15.2) 23.9,15.9 24.775,16.775 24.775,20.125 v1(26.8,22.15)
SWDIO: DD3.34 XP3.3 | length 23.3
  Top Layer 1 w0.25: DD3.34 18.758,13.442 18.758,12.723 19.055,12.425 21.409,12.425 21.617,12.633 23.471,12.633 24.359,13.52 v1(24.828,13.52) ; XP3.3 23.725,24.859 23.725,24.025 24.542,23.208 24.767,23.208 25.85,22.125 v1(25.85,22.1)
  Bottom Layer 1 w0.25: v1(24.828,13.52) 23.821,13.52 23.25,14.091 23.25,15.886 24.325,16.961 24.325,20.532 24.692,20.899 24.692,20.942 v1(25.85,22.1)
Temperature_sensor: DA3.7 XP4.2 | length 12.7
  Bottom Layer 1 w0.25: DA3.7 18.876,30.849 19.251,31.225 21.05,31.225 21.575,30.7 21.575,28.875 23.525,26.925 24.4,26.925 25.5,25.825 25.5,25.5 XP4.2
USART1_DE: DD2.2 DD2.3 DD3.29 | length 6.5
  Top Layer 1 w0.25: DD3.29 16.258,13.442 16.258,8.332 DD2.3 DD2.2
USART1_RX: DD2.1 DD3.31 | length 5.9
  Top Layer 1 w0.25: DD3.31 17.25,11.682 18.682,10.25 18.682,9.649 18.905,9.426 DD2.1
USART1_TX: DD2.4 DD3.30 | length 11.3
  Top Layer 1 w0.25: DD2.4 15.095,7.255 15.55,6.8 17.695,6.8 18.26,7.365 18.26,9.366 16.75,10.876 DD3.30
pads on no net: DA2.4 DA3.10 DA3.11 DD1.1 DD1.5 DD3.1 DD3.2 DD3.3 DD3.4 DD3.11 DD3.12 DD3.18 DD3.19 DD3.20 DD3.21 DD3.22 DD3.25 DD3.26 DD3.27 DD3.28 DD3.38 DD3.39 DD3.40 DD3.41 DD3.42 DD3.43 DD3.45 DD3.46 DD4.5

## Polygon pours and split planes (outlines as drawn)
GND on Bottom Layer 1 "Bottom_Layer_GND" (solid, pour order 4): 17.025,0.125 cw(c17.025,17.125) 0.025,17.125 cw(c17.025,17.125) 17.025,34.125 cw(c17.025,17.125) 34.025,17.125 cw(c17.025,17.125)
5V on Bottom Layer 1 "Bottom_Layer_5V" (solid, pour order 3): 18.05,13.625 17.5,13.625 16.738,12.659 16.669,7.581 18.05,6.2 18.05,2.625 18.875,1.8 21.275,1.8 21.275,5.875 20.675,6.475 19.95,6.475 18.875,7.55 18.875,13.1 18.325,13.65
NetC2_1 on Bottom Layer 1 "Bottom_Layer_NETC2_1" (solid, pour order 2): 11.731,6.975 14.071,6.975 15.439,6.134 15.55,2.35 14.787,1.975 10.65,2.2 9.675,2.5 10.65,5.402
24V on Bottom Layer 1 "Bottom_Layer_24V" (solid, pour order 0): 9.1,10.775 10.05,10.775 10.243,10.432 10.375,9.375 10.64,5.402 9.1,5.125 8.06,7.552 7.927,9.43 8.5,10.575
GND on Top Layer 1 "Top_Layer_GND" (solid, pour order 5): 17.025,0.125 cw(c17.025,17.125) 0.025,17.125 cw(c17.025,17.125) 17.025,34.125 cw(c17.025,17.125) 34.025,17.125 cw(c17.025,17.125)

## Keep-outs
Keep-Out Layer:
  lines w0.1: -0.025,17.125 cw(c17.025,17.125) 17.025,34.175 cw(c17.025,17.125) 34.075,17.125 cw(c17.025,17.125) 17.025,0.075 cw(c17.025,17.125) -0.025,17.125

## Other copper
Top Layer 1:
  pour cut-out: 3.5,14.25 cw(c3.5,17.5) 0.25,17.5 cw(c3.5,17.5) 3.5,20.75 cw(c3.5,17.5) 6.75,17.5 cw(c3.5,17.5)
  pour cut-out: 27.25,17.5 ccw(c30.5,17.5) 30.5,14.25 ccw(c30.5,17.5) 33.75,17.5 ccw(c30.5,17.5) 30.5,20.75 ccw(c30.5,17.5)
Bottom Layer 1:
  pour cut-out: 3.5,14.25 cw(c3.5,17.5) 0.25,17.5 cw(c3.5,17.5) 3.5,20.75 cw(c3.5,17.5) 6.75,17.5 cw(c3.5,17.5)
  pour cut-out: 27.25,17.5 ccw(c30.5,17.5) 30.5,14.25 ccw(c30.5,17.5) 33.75,17.5 ccw(c30.5,17.5) 30.5,20.75 ccw(c30.5,17.5)

## Silkscreen, mask and mechanical layers (free items; w line width, h text height)
Top Overlay:
  text "GND" at 21.674,24.655 h1 r45
  text "SD" at 23.274,24.255 h1 r45
  text "SC" at 24.247,23.129 h1 r45
  text "3.3" at 26.221,21.802 h1 r45
  text "VIN" at 6.94,11.422 h1 r45
  text "RS485N CANH" at 32.354,11.002 h1 r135
  text "GND" at 10.674,7.555 h1 r45
  text "RS485P CANL" at 24.654,3.202 h1 r135
Bottom Overlay:
  text "GND" at 12.426,23.055 h1 r315
  text "5V" at 21.656,23.048 h1 r45
  text "TEMP" at 22.59,22.171 h1 r45
  text "5V" at 10.048,21.944 h1 r315
  text "PRESS" at 11.739,21.942 h1 r315
  text "GND" at 23.545,21.226 h1 r45
Mechanical 4:
  the board outline again, w0.1